# Allegro board REMOTER_V1.0_20191203.brd
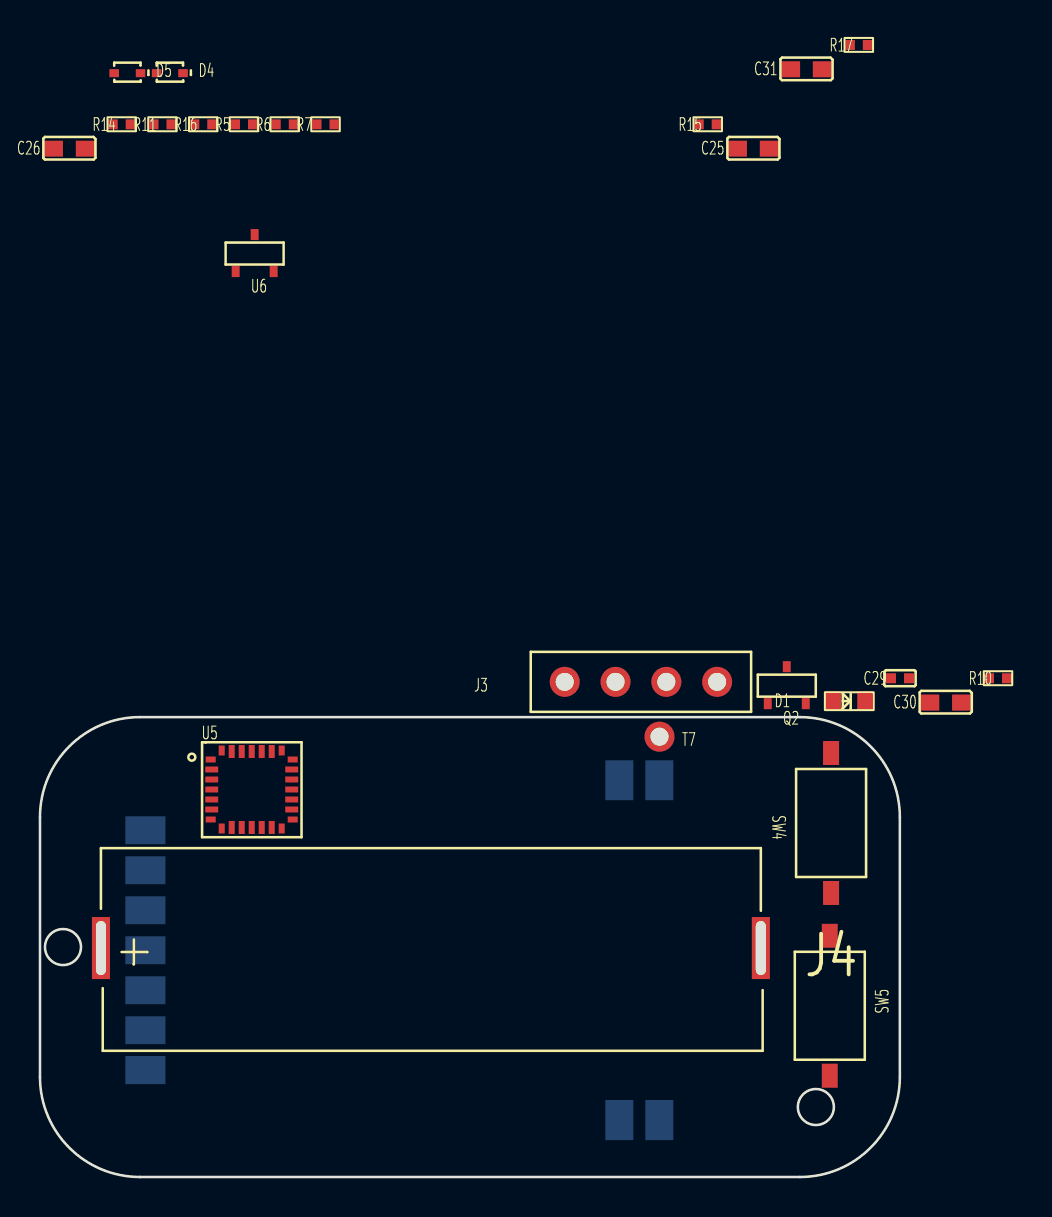
[diagram p0: board, top side]
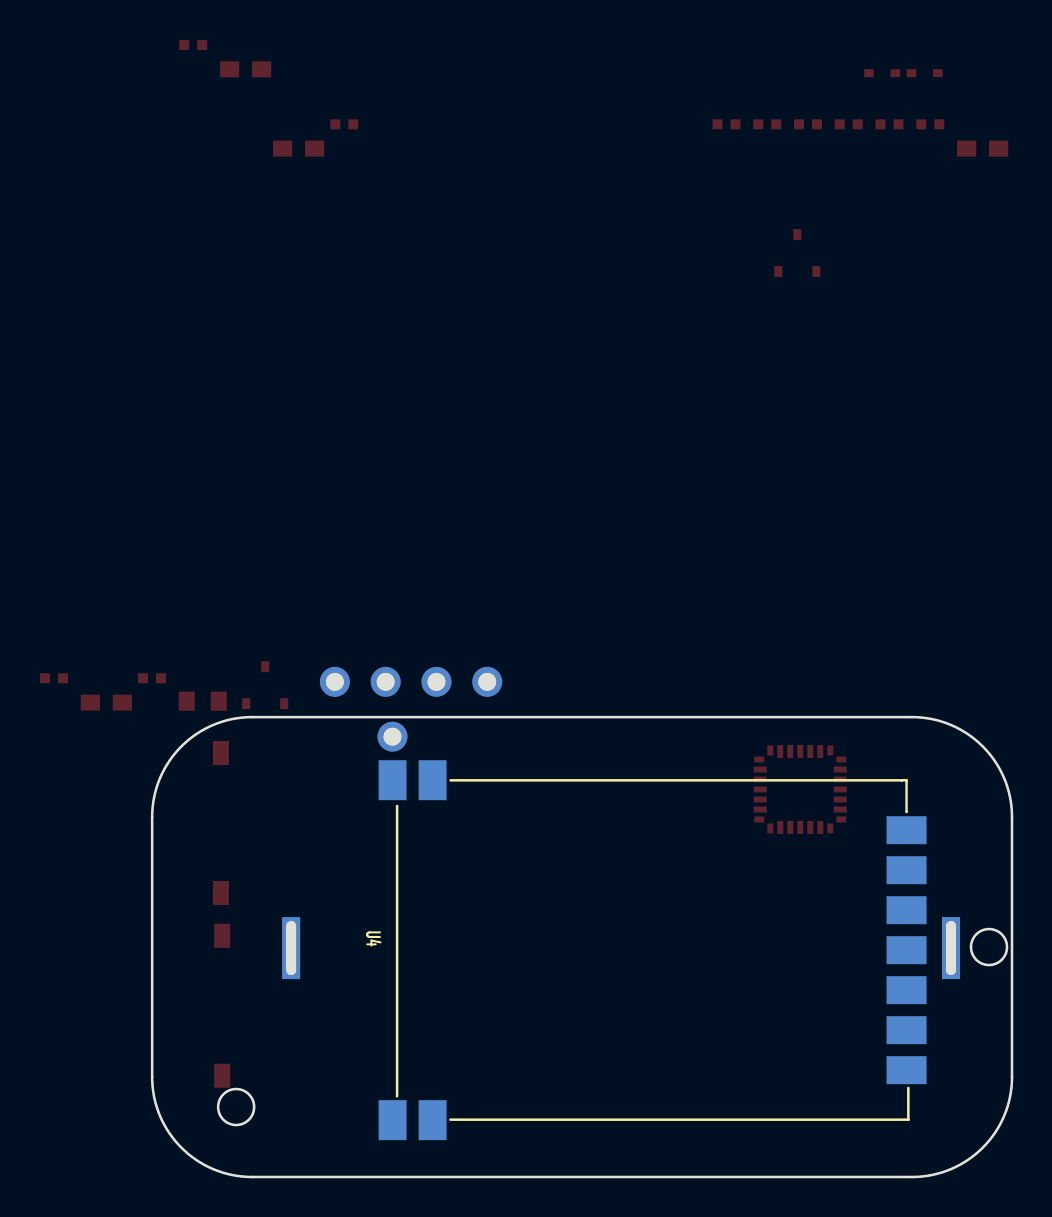
[diagram p1: board, bottom side, seen from below]

Outline 43 x 23 mm; copper layers: TOP, BOTTOM. Coordinates in mm from the lower left corner of the outline.
Outline path: circle c1.15,11.5 r0.9 ; circle c38.8,3.5 r0.9 ; 0,18 arc(1.46,21.54) 5,23 38,23 arc(41.54,21.54) 43,18 43,5 arc(41.54,1.46) 38,0 5,0 arc(1.46,1.46) 0,5 0,18

## Placement (name value [footprint] x y rotation side)
C25  10uF  [C0603]  34.87 51.43 0 top
C26  0.1uF  [C0603]  0.67 51.43 0 top
C29  47P  [C0402]  42.56 24.94 0 top
C30  10uF/10V  [C0603]  44.49 23.73 0 top
C31  10uF  [C0603]  37.53 55.4 0 top
D1  F5F1  [LED0603]  39.67 23.8 0 top
D4  BAT54XV2  [SOD-523]  5.83 55.21 0 top
D5  BAT54XV2  [SOD-523]  3.71 55.21 0 top
J3  -  [CON4]  26.24 24.76 0 top
J4  CON2  [ER10280]  3.05 11.45 0 top
Q2  WPM2015-3/TR  [SOT23-3]  37.35 25.52 0 top
R5  1K  [R0402]  9.75 52.65 0 top
R6  10K  [R0402]  11.79 52.65 0 top
R7  10K  [R0402]  13.83 52.65 0 top
R10  100K  [R0402]  47.46 24.94 0 top
R11  100K  [R0402]  5.68 52.65 0 top
R14  10K  [R0402]  3.64 52.65 0 top
R15  10K  [R0402]  32.94 52.65 0 top
R16  100K  [R0402]  7.71 52.65 0 top
R17  1K  [R0402]  40.5 56.61 0 top
SW4  SENS59150-SPST  [KEY_3X6]  39.56 21.2 270 top
SW5  SENS59150-SPST  [KEY_3X6]  39.5 5.06 90 top
T7  TEST  [ANT_HOLE]  30.98 22.02 0 top
U4  E32433T20S  [E32-433T20S]  5.27 19.84 270 bottom
U5  STM32F031G4U  [QFN28_NOLEAD]  10.59 19.38 0 top
U6  TLV76033DBZT  [SOT23-3]  10.73 47.13 0 top

## Library data of the parts
C25 C26 C29-C31 = CAP NP
D1 = F5F1
D4 = DIODE 34/DD_0
D5 = DIODE 34/DD_1
J3 = CON4
J4 = CON2
Q2 = 2N6660
R5-R7 R10 R11 R14-R17 = RESISTOR
SW4 SW5 = SENS59150-SPST
T7 = TEST
U4 = E32433T20S
U5 = STM32F031G4U
U6 = TLV760

## Footprints (pads in the part's own frame, mm; a bottom-side part is the same pattern mirrored in y, then rotated)
ANT_HOLE
  round 1.5 hole 0.9: 1(0,0)
C0402
  rect 0.5x0.5 smd: 1(0,0) 2(0.9,0)
C0603
  rect 0.96x0.8 smd: 1(0,0) 2(1.6,0)
CON4
  round 1.5 hole 0.9: 1(0,0) 2(2.54,0) 3(5.08,0) 4(7.62,0)
E32-433T20S
  rect 1.4x2 smd: 1(14.5,0) 2(12.5,0) 3(10.5,0) 4(8.5,0) 5(6.5,0) 6(4.5,0) 7(2.5,0)
  rect 2x1.4 smd: 8(0,-23.7) 9(0,-25.7) 10(17,-25.7) 11(17,-23.7)
ER10280
  rect 0.9x3.1 hole 0.5x2.7: 1(0,0) 2(33,0)
KEY_3X6
  rect 1.2x0.8 smd: 1(0,0) 2(7,0)
LED0603
  rect 0.8x0.96 smd: 1(0,0) 2(1.6,0)
QFN28_NOLEAD
  rect 0.5x0.3 smd: 1(-2.05,1.5) 7(-2.05,-1.5) 15(2.05,-1.5) 21(2.05,1.5)
  rect 0.65x0.3 smd: 2(-2,1) 3(-2,0.5) 4(-2,0) 5(-2,-0.5) 6(-2,-1) 16(2,-1) 17(2,-0.5) 18(2,0) 19(2,0.5) 20(2,1)
  rect 0.3x0.5 smd: 8(-1.5,-1.95) 14(1.5,-1.95) 22(1.5,1.95) 28(-1.5,1.95)
  rect 0.3x0.65 smd: 9(-1,-1.9) 10(-0.5,-1.9) 11(0,-1.9) 12(0.5,-1.9) 13(1,-1.9) 23(1,1.9) 24(0.5,1.9) 25(0,1.9) 26(-0.5,1.9) 27(-1,1.9)
R0402
  rect 0.5x0.5 smd: 1(0,0) 2(0.9,0)
SOD-523
  rect 0.48x0.4 smd: 1(0,0) 2(1.32,0)
SOT23-3
  rect 0.4x0.55 smd: 1(-0.95,-1.85) 2(0.95,-1.85) 3(0,0)

## Nets
GND: C25.1 C26.1 C29.1 C30.1 C31.1 J3.3 J4.2 R6.2 R11.2 R14.2 R15.1 U4.7(GND#7) U4.8(GND#8) U4.10(GND#10) U4.11(GND#11) U5.16(VSS) U6.3(GND)
VBAT: C31.2 J4.1 U6.2(VIN)
VCC_3.3V: C25.2 C26.2 C30.2 J3.1 Q2.3(D) R5.1 R7.2 R10.1 R17.2 U4.6(VCC) U5.5(VDDA) U5.17(VDD)
AUX: U4.5(AUX)
LOCK: R15.2 SW4.1 U5.6(PA0)
M0: U4.1(M0)
M1: U4.2(M1)
PWR_EN: D4.1(ANODE) D5.1(ANODE) Q2.1(G) R16.2 U5.7(PA1)
RST: C29.2 R7.1 U5.4(NRST)
RXD: U4.4(TXD)
SWCLK: J3.2 U5.22(PA14)
SWDIO: J3.4 U5.21(PA13)
TXD: U4.3(RXD)
ULOCK: R14.1 SW5.1 U5.8(PA2/TX1)
VOUT: Q2.2(S) R16.1 U6.1(OUT)
N30748: D1.2(ANODE) R5.2
N35930: R6.1 U5.1(BOOT0)
N36540: U5.9(PA3/RX1)
N37184: T7.1(TP) U4.9(ANT)
N38105: R10.2 R11.1 U5.11(PA5)
N38360: D1.1(CATHODE) U5.20(PA10)
N43164: D4.2(CATHODE) D5.2(CATHODE) R17.1 SW4.2 SW5.2

Pads without a net: U5 2 3 10 12 13 14 15 18 19 23 24 25 26 27 28
